# EAGLE board BITS GOA_Arduino_MEGA2560 shield (1) (EAGLE 6.5.0)
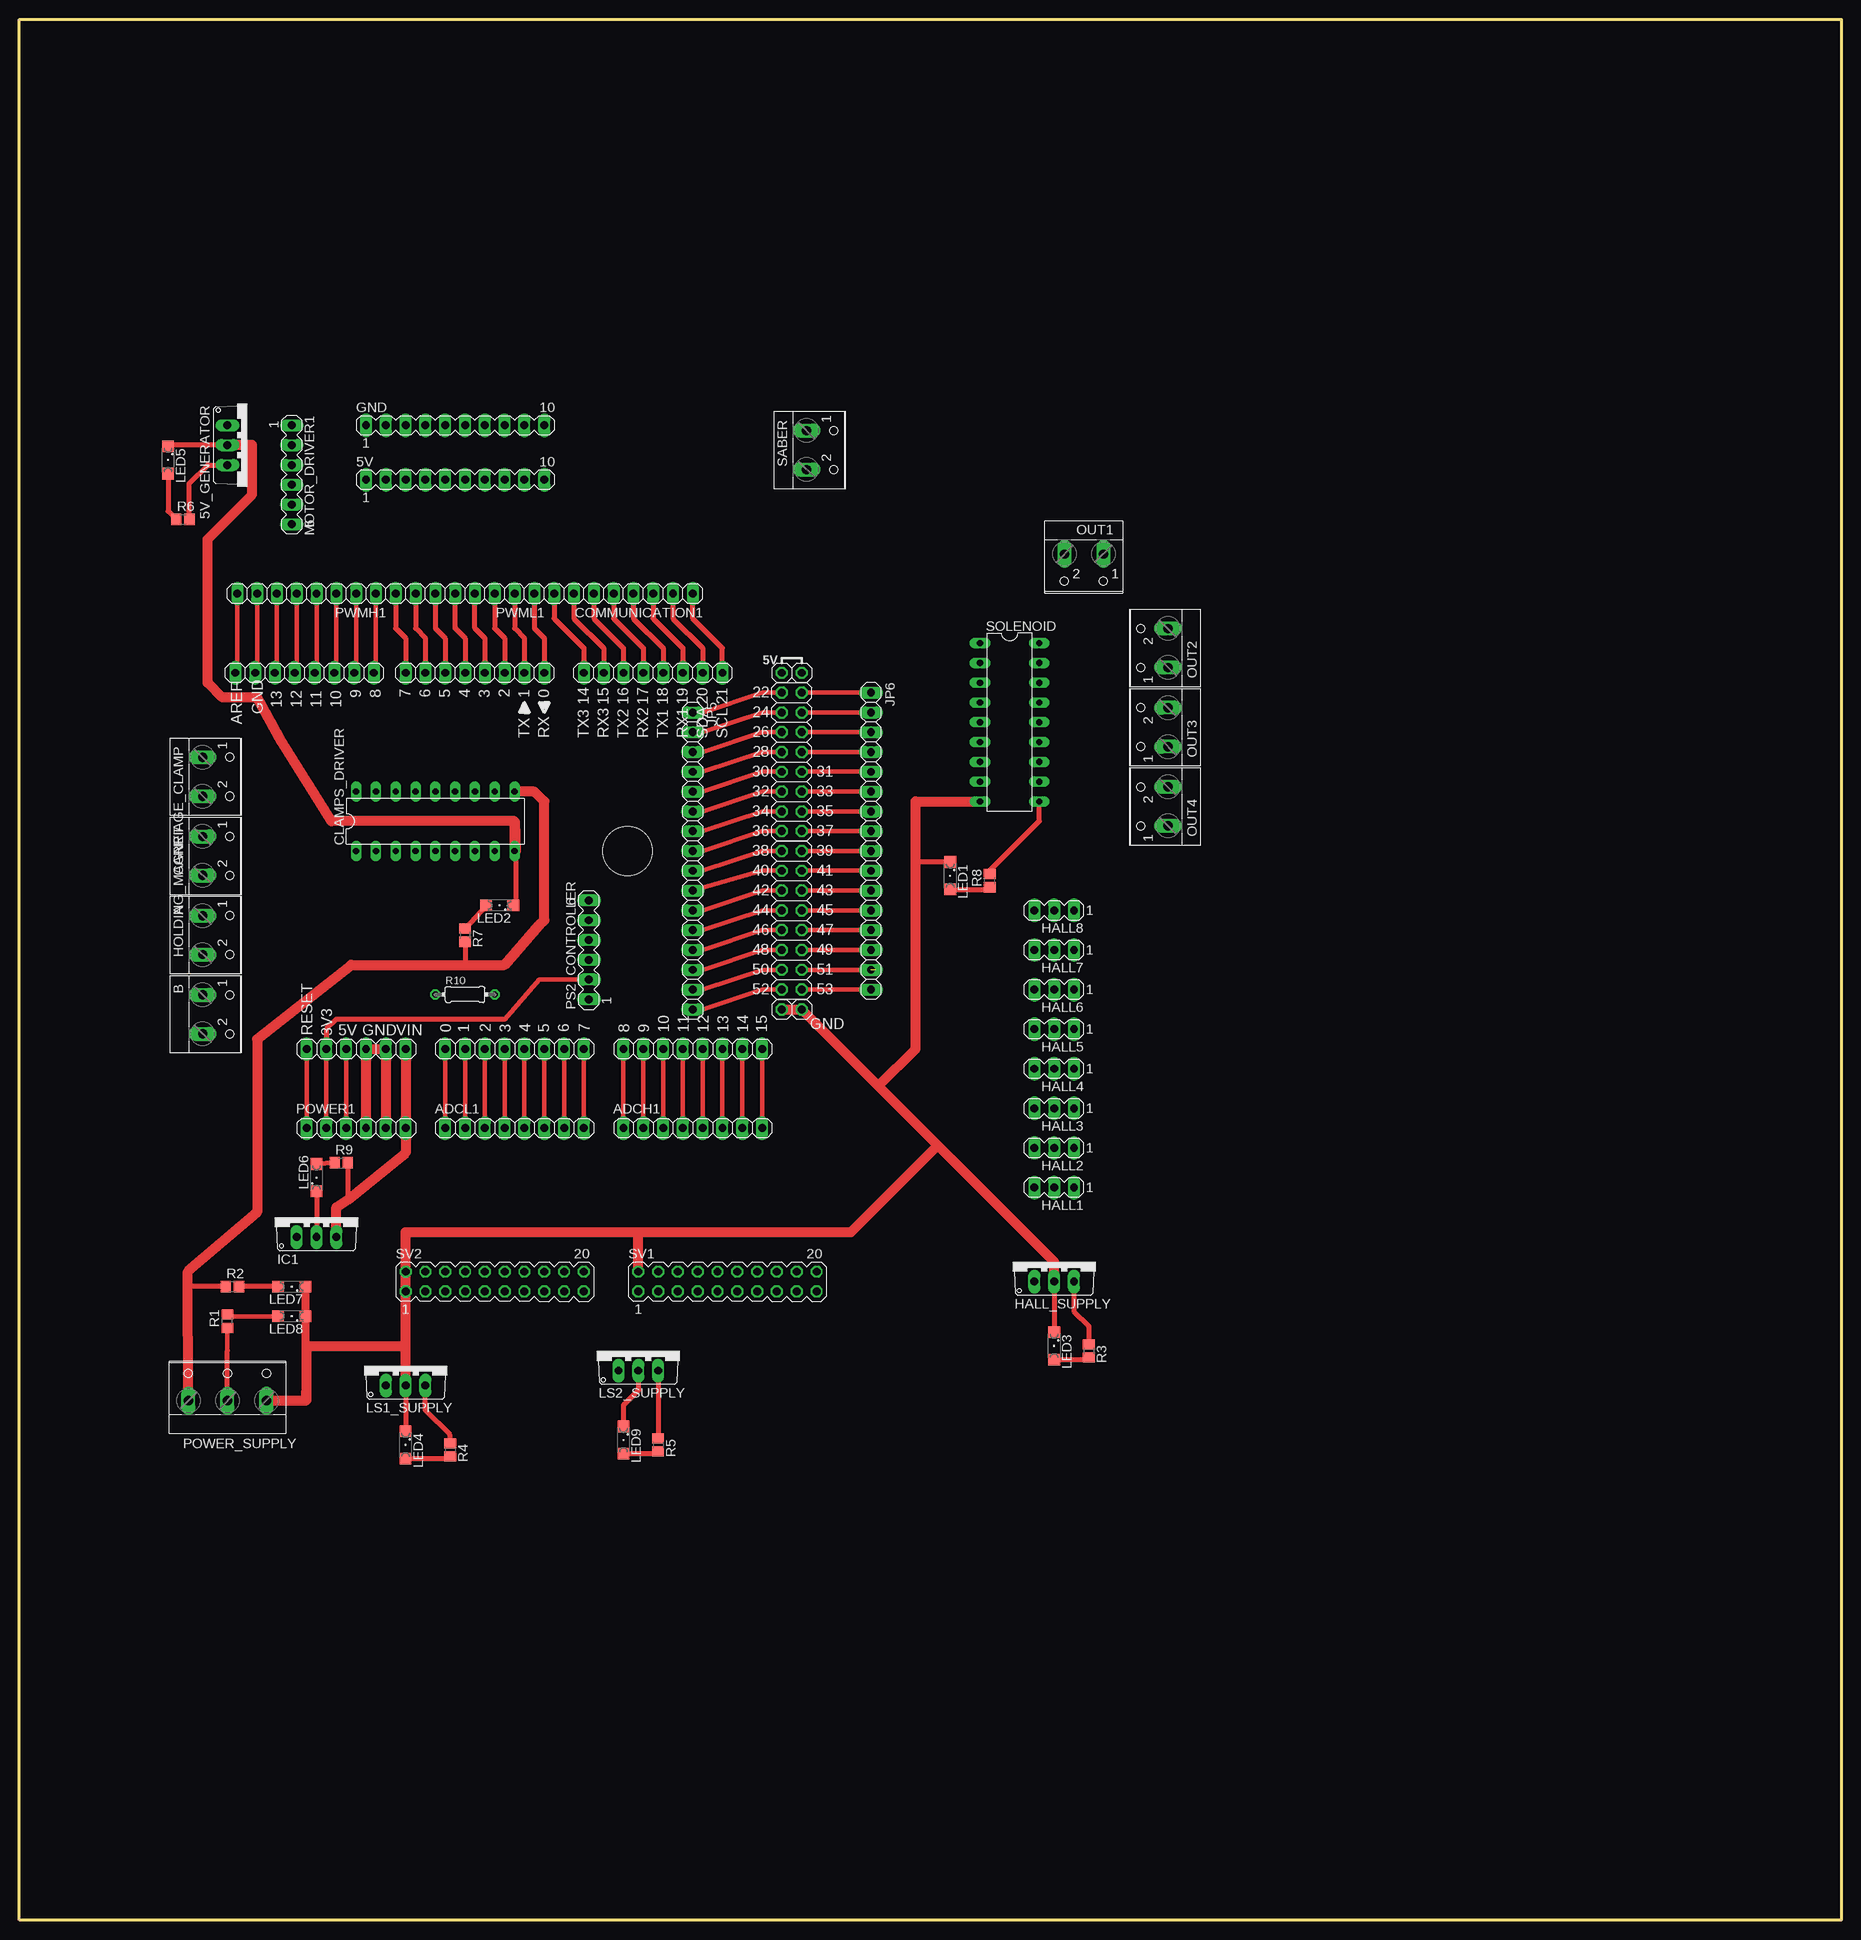
[diagram p0: board, top side]
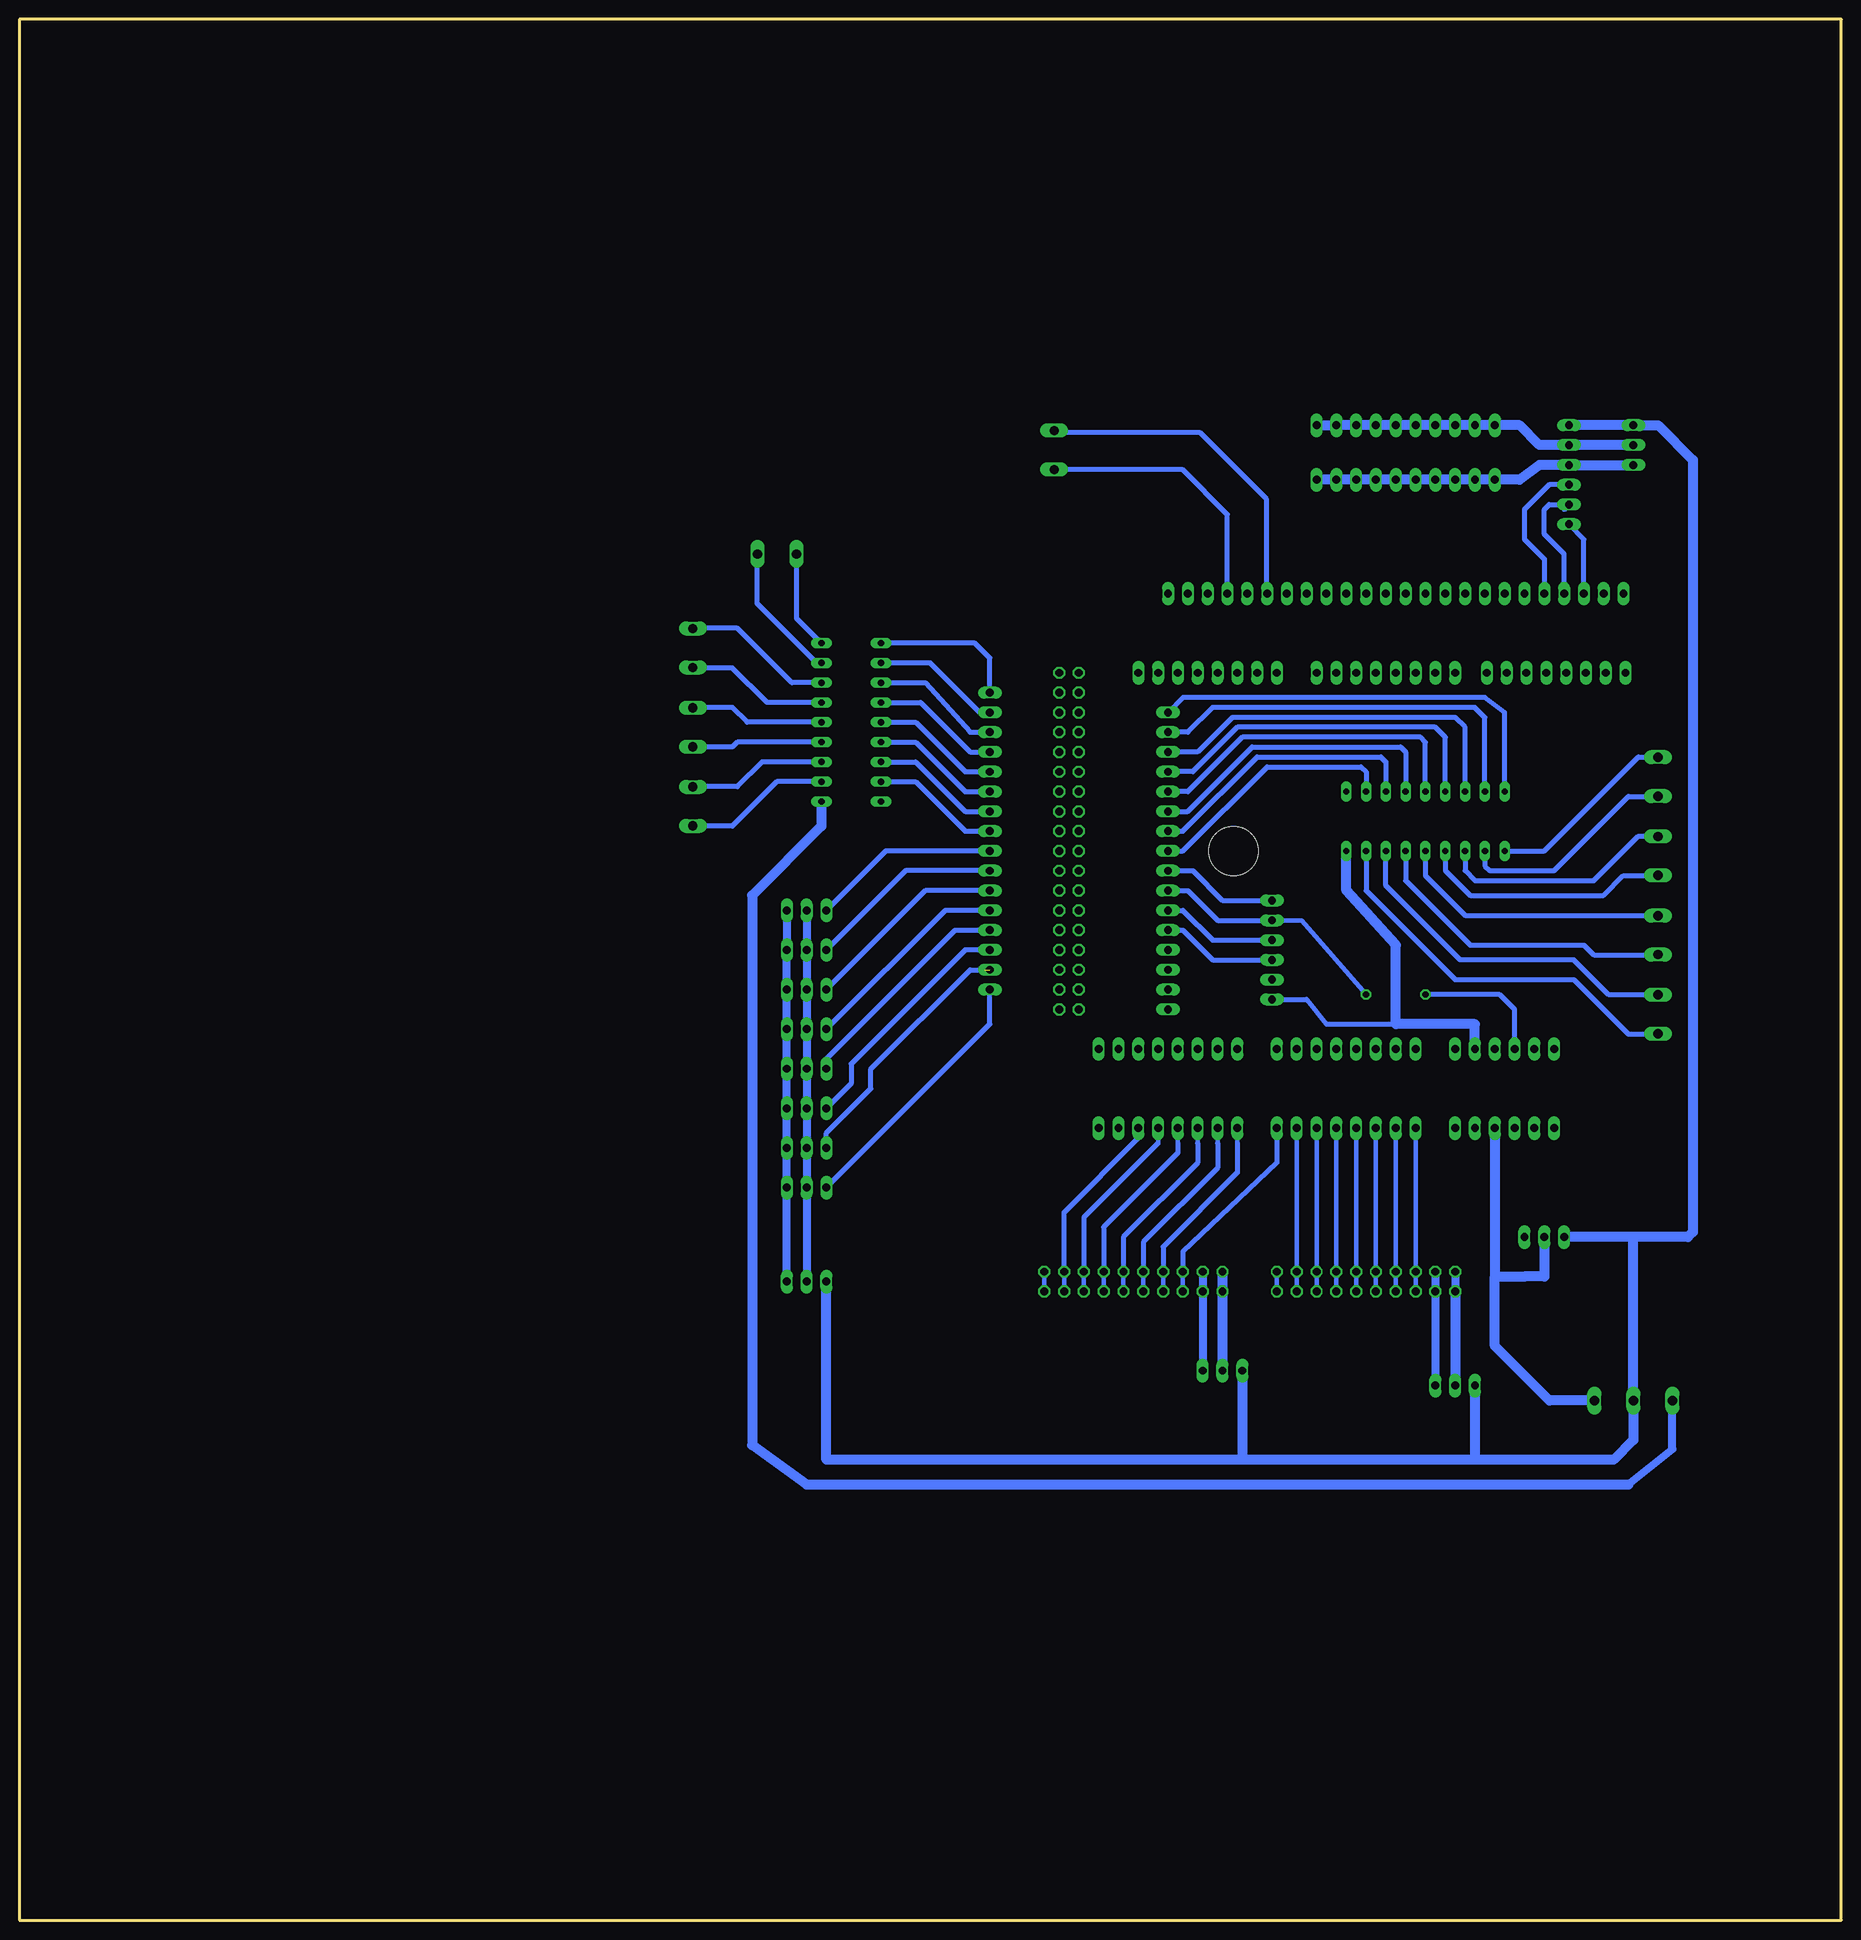
[diagram p1: board, bottom side, seen from below]

Size 233.68 x 243.84 mm. Coordinates in mm from the lower left corner, seen from the top.
Outline: 0,0 0,243.84 233.68,243.84 233.68,0 0,0
Copper layers (1*16): Top 0.035mm / dielectric 1.5mm / Bottom 0.035mm
Design rules "default": minimum track width 6mil, minimum drill 12mil, track to track 6mil, track to pad 6mil, pad to pad 6mil, via to via 6mil, smd to smd 6mil, copper to edge 40mil, drill to drill 12mil, minimum pad ring 10mil, minimum via ring 10mil, stop-mask expansion 2mil, vias tented up to drill 1mil, thermal gap 10mil
Net classes: 0 default: width 0.6 mm, drill 0.305 mm, clearance 0.305 mm; 1 GND: width 1 mm, drill 0.305 mm, clearance 0.305 mm to class 0, clearance 0.305 mm; 2 Power: width 1 mm, drill 0.305 mm, clearance 0.305 mm to class 0, clearance 0.305 mm to class 1, clearance 0.305 mm
Holes 6.35 mm at 77.98,137.16

## Footprints (pad centres in the part's own frame; a part is rotated, then mirrored left to right if it is on the bottom)
MA10-1 = drill 1.016 long: 1 -11.43,0; 2 -8.89,0; 3 -6.35,0; 4 -3.81,0; 5 -1.27,0; 6 1.27,0; 7 3.81,0; 8 6.35,0; 9 8.89,0; 10 11.43,0
TO220V = drill 1.016 long: 1 -2.54,-2.54; 2 0,-2.54; 3 2.54,-2.54
W237-102 = drill 1.194 long: 1 -2.5,-1.27; 2 2.5,-1.27
1X08 = drill 1.016 long: 1 -8.89,0; 2 -6.35,0; 3 -3.81,0; 4 -1.27,0; 5 1.27,0; 6 3.81,0; 7 6.35,0; 8 8.89,0
DIL18 = drill 0.813 long: 1 -10.16,-3.81; 2 -7.62,-3.81; 3 -5.08,-3.81; 4 -2.54,-3.81; 5 0,-3.81; 6 2.54,-3.81; 7 5.08,-3.81; 8 7.62,-3.81; 9 10.16,-3.81; 10 10.16,3.81; 11 7.62,3.81; 12 5.08,3.81; 13 2.54,3.81; 14 0,3.81; 15 -2.54,3.81; 16 -5.08,3.81; 17 -7.62,3.81; 18 -10.16,3.81
MA03-1 = drill 1.016 long: 1 -2.54,0; 2 0,0; 3 2.54,0
1X01 = drill 1.016 octagon: 1 0,0
1X16 = drill 1.016 long: 1 -19.05,0; 2 -16.51,0; 3 -13.97,0; 4 -11.43,0; 5 -8.89,0; 6 -6.35,0; 7 -3.81,0; 8 -1.27,0; 9 1.27,0; 10 3.81,0; 11 6.35,0; 12 8.89,0; 13 11.43,0; 14 13.97,0; 15 16.51,0; 16 19.05,0
SML1206 = smd 1.5 x 1.5: A 1.75,0; C -1.75,0
MA06-1 = drill 1.016 long: 1 -6.35,0; 2 -3.81,0; 3 -1.27,0; 4 1.27,0; 5 3.81,0; 6 6.35,0
1X06 = drill 1.016 long: 1 -6.35,0; 2 -3.81,0; 3 -1.27,0; 4 1.27,0; 5 3.81,0; 6 6.35,0
W237-103 = drill 1.194 long: 1 -5,-1.29; 2 0,-1.29; 3 5,-1.29
R0805 = smd 1.3 x 1.5: 1 -0.85,0; 2 0.85,0
0204/7 = drill 0.813 octagon: 1 -3.81,0; 2 3.81,0
MA10-2 = drill 1.016 octagon: 1 -11.43,-1.27; 2 -11.43,1.27; 3 -8.89,-1.27; 4 -8.89,1.27; 5 -6.35,-1.27; 6 -6.35,1.27; 7 -3.81,-1.27; 8 -3.81,1.27; 9 -1.27,-1.27; 10 -1.27,1.27; 11 1.27,-1.27; 12 1.27,1.27; 13 3.81,-1.27; 14 3.81,1.27; 15 6.35,-1.27; 16 6.35,1.27; 17 8.89,-1.27; 18 8.89,1.27; 19 11.43,-1.27; 20 11.43,1.27
2X08 = drill 1.016 octagon: 1 -8.89,-1.27; 2 -8.89,1.27; 3 -6.35,-1.27; 4 -6.35,1.27; 5 -3.81,-1.27; 6 -3.81,1.27; 7 -1.27,-1.27; 8 -1.27,1.27; 9 1.27,-1.27; 10 1.27,1.27; 11 3.81,-1.27; 12 3.81,1.27; 13 6.35,-1.27; 14 6.35,1.27; 15 8.89,-1.27; 16 8.89,1.27

## Placement (x,y rotation side)
5V  [MA10-1]  55.88,184.78 0 top
5V_GENERATOR  7805TV  [TO220V]  29.21,189.23 270 top
A  [W237-102]  24.77,126.37 270 top
ADCH  [1X08]  86.36,111.76 0 top
ADCH1  [1X08]  86.36,101.6 0 top
ADCL  [1X08]  63.5,111.76 0 top
ADCL1  [1X08]  63.5,101.6 0 top
B  [W237-102]  24.77,116.2 270 top
CARRIAGE_CLAMP  [W237-102]  24.77,146.69 270 top
CLAMPS_DRIVER  [DIL18]  53.34,140.97 0 top
COMMUNICATION  [1X08]  81.28,160.02 180 top
COMMUNICATION1  [1X08]  77.47,170.18 180 top
GND  [MA10-1]  55.88,191.77 0 top
HALL1  [MA03-1]  132.72,93.98 180 top
HALL2  [MA03-1]  132.72,99.06 180 top
HALL3  [MA03-1]  132.72,104.14 180 top
HALL4  [MA03-1]  132.72,109.22 180 top
HALL5  [MA03-1]  132.72,114.3 180 top
HALL6  [MA03-1]  132.72,119.38 180 top
HALL7  [MA03-1]  132.72,124.46 180 top
HALL8  [MA03-1]  132.72,129.54 180 top
HALL_SUPPLY  7805TV  [TO220V]  132.72,84.45 0 top
HOLDING_MAGNET  [W237-102]  24.77,136.53 270 top
IC1  7812TV  [TO220V]  38.1,90.17 0 top
JP1  [1X01]  97.79,160.02 0 top
JP2  [1X01]  100.33,160.02 0 top
JP3  [1X01]  97.79,116.84 0 top
JP4  [1X01]  100.33,116.84 0 top
JP5  [1X16]  86.36,135.89 270 top
JP6  [1X16]  109.22,138.43 270 top
LED1  [SML1206]  119.38,133.98 270 top
LED2  [SML1206]  61.59,130.18 180 top
LED3  [SML1206]  132.72,73.66 270 top
LED4  [SML1206]  49.53,60.96 270 top
LED5  [SML1206]  19.05,187.33 270 top
LED6  [SML1206]  38.1,95.25 90 top
LED7  [SML1206]  34.92,81.28 180 top
LED8  [SML1206]  34.92,77.47 180 top
LED9  [SML1206]  77.47,61.59 270 top
LS1_SUPPLY  7805TV  [TO220V]  49.53,71.12 0 top
LS2_SUPPLY  7805TV  [TO220V]  79.38,73.03 0 top
MOTOR_DRIVER1  [MA06-1]  34.92,185.42 270 top
OUT1  [W237-102]  136.52,173.99 180 top
OUT2  [W237-102]  146.05,163.19 90 top
OUT3  [W237-102]  146.05,153.03 90 top
OUT4  [W237-102]  146.05,142.88 90 top
POWER  [1X06]  43.18,111.76 0 top
POWER1  [1X06]  43.18,101.6 0 top
POWER_SUPPLY  [W237-103]  26.67,67.94 0 top
PS2_CONTROLLER  [MA06-1]  73.03,124.46 90 top
PWMH  [1X08]  36.58,160.02 180 top
PWMH1  [1X08]  36.83,170.18 180 top
PWML  [1X08]  58.42,160.02 180 top
PWML1  [1X08]  57.15,170.18 180 top
R1  [R0805]  26.67,76.83 90 top
R2  [R0805]  27.3,81.28 0 top
R3  [R0805]  137.16,73.03 270 top
R4  [R0805]  55.24,60.32 270 top
R5  [R0805]  81.92,60.96 270 top
R6  [R0805]  20.96,179.71 0 top
R7  [R0805]  57.15,126.37 270 top
R8  [R0805]  124.46,133.35 90 top
R9  [R0805]  41.27,97.16 0 top
R10  [0204/7]  57.15,118.75 0 top
SABER  [W237-102]  102.23,188.59 270 top
SOLENOID  [DIL18]  127,153.67 270 top
SV1  [MA10-2]  90.81,81.91 0 top
SV2  [MA10-2]  60.96,81.91 0 top
XIOH  [2X08]  99.06,148.59 90 top
XIOL  [2X08]  99.06,128.27 90 top

## Library data of the parts
5V GND HALL1-HALL8 MOTOR_DRIVER1 PS2_CONTROLLER SV1 SV2 = con-lstb; OC_FARNELL: unknown; OC_NEWARK: unknown
5V_GENERATOR HALL_SUPPLY IC1 LS1_SUPPLY LS2_SUPPLY = linear
A B CARRIAGE_CLAMP HOLDING_MAGNET OUT1-OUT4 SABER = con-wago-500; MPN: 237-102; OC_FARNELL: unknown; OC_NEWARK: 70K9898
ADCH ADCH1 ADCL ADCL1 COMMUNICATION COMMUNICATION1 JP1-JP6 POWER POWER1 PWMH PWMH1 PWML PWML1 XIOH XIOL = pinhead
CLAMPS_DRIVER SOLENOID = uln-udn
LED1-LED9 = led
POWER_SUPPLY = con-wago-500; MPN: 237-103; OC_FARNELL: unknown; OC_NEWARK: 18M7116
R1-R9 = resistor
R10 = eagle-ltspice; SPICEMODEL: NONE; SPICEPREFIX: R

## Nets
+5V [Power]: HALL1.1 HALL2.1 HALL3.1 HALL4.1 HALL5.1 HALL6.1 HALL7.1 HALL8.1 HALL_SUPPLY.3 R3.1
+12V [Power]: 5V_GENERATOR.1 HALL_SUPPLY.1 IC1.1 LS1_SUPPLY.1 LS2_SUPPLY.1 MOTOR_DRIVER1.1 POWER_SUPPLY.2 R1.1
+24V [Power]: CLAMPS_DRIVER.10 POWER_SUPPLY.1 R2.1 R7.2 R8.2 SOLENOID.10
GND [GND]: 5V_GENERATOR.2 CLAMPS_DRIVER.9 GND.1 GND.2 GND.3 GND.4 GND.5 GND.6 GND.7 GND.8 GND.9 GND.10 HALL1.2 HALL2.2 HALL3.2 HALL4.2 HALL5.2 HALL6.2 HALL7.2 HALL8.2 HALL_SUPPLY.2 IC1.2 JP3.1 JP4.1 LED1.C LED2.C LED3.C LED4.C LED5.C LED6.C LED7.C LED8.C LED9.C LS1_SUPPLY.2 LS2_SUPPLY.2 MOTOR_DRIVER1.2 POWER1.4 POWER1.5 POWER.4 POWER.5 POWER_SUPPLY.3 PS2_CONTROLLER.1 SOLENOID.9 SV1.1 SV1.2 SV2.1 SV2.2
N$1: PWMH1.1 PWMH.1
N$2: PWMH1.2 PWMH.2
N$3: PWMH1.3 PWMH.3
N$4: MOTOR_DRIVER1.4 PWMH1.4 PWMH.4
N$5: MOTOR_DRIVER1.5 PWMH1.5 PWMH.5
N$6: MOTOR_DRIVER1.6 PWMH1.6 PWMH.6
N$7: PWMH1.7 PWMH.7
N$8: PWMH1.8 PWMH.8
N$9: ADCH1.8 ADCH.8
N$11: ADCH1.6 ADCH.6 SV1.17 SV1.18
N$12: ADCH1.5 ADCH.5 SV1.15 SV1.16
N$13: ADCH1.4 ADCH.4 SV1.13 SV1.14
N$14: ADCH1.3 ADCH.3 SV1.11 SV1.12
N$15: ADCH1.2 ADCH.2 SV1.9 SV1.10
N$16: ADCH1.1 ADCH.1 SV1.7 SV1.8
N$17: POWER1.1 POWER.1
N$18: POWER1.2 POWER.2 PS2_CONTROLLER.2
N$19: POWER1.3 POWER.3 R10.1
N$20 [Power]: IC1.3 POWER1.6 POWER.6 R9.2
N$21: LED7.A R2.2
N$22: OUT1.2 SOLENOID.18
N$23: COMMUNICATION1.8 COMMUNICATION.8
N$24: COMMUNICATION1.7 COMMUNICATION.7
N$25: COMMUNICATION1.6 COMMUNICATION.6 SABER.1
N$26: COMMUNICATION1.5 COMMUNICATION.5
N$27: COMMUNICATION1.4 COMMUNICATION.4 SABER.2
N$28: COMMUNICATION1.3 COMMUNICATION.3
N$29: COMMUNICATION1.2 COMMUNICATION.2
N$30: COMMUNICATION1.1 COMMUNICATION.1
N$31: PWML1.8 PWML.8
N$32: PWML1.7 PWML.7
N$33: PWML1.6 PWML.6
N$34: PWML1.5 PWML.5
N$35: PWML1.4 PWML.4
N$36: PWML1.3 PWML.3
N$37: PWML1.2 PWML.2
N$38: PWML1.1 PWML.1
N$39: ADCL1.8 ADCL.8 SV1.5 SV1.6
N$40: ADCL1.7 ADCL.7 SV2.17 SV2.18
N$42: ADCL1.5 ADCL.5 SV2.13 SV2.14
N$44: ADCL1.3 ADCL.3 SV2.9 SV2.10
N$45: ADCL1.2 ADCL.2 SV2.7 SV2.8
N$46: ADCL1.1 ADCL.1 SV2.5 SV2.6
N$47: CLAMPS_DRIVER.18 JP5.1 XIOH.16
N$48: CLAMPS_DRIVER.17 JP5.2 XIOH.14
N$49: CLAMPS_DRIVER.16 JP5.3 XIOH.12
N$50: CLAMPS_DRIVER.15 JP5.4 XIOH.10
N$51: CLAMPS_DRIVER.14 JP5.5 XIOH.8
N$52: CLAMPS_DRIVER.13 JP5.6 XIOH.6
N$53: CLAMPS_DRIVER.12 JP5.7 XIOH.4
N$54: JP5.12 PS2_CONTROLLER.3 XIOL.10
N$55: JP5.9 PS2_CONTROLLER.6 XIOL.16
N$56: JP5.10 PS2_CONTROLLER.5 R10.2 XIOL.14
N$57: JP5.11 PS2_CONTROLLER.4 XIOL.12
N$58: JP5.13 XIOL.8
N$59: JP5.14 XIOL.6
N$60: JP5.15 XIOL.4
N$61: JP6.1 SOLENOID.1 XIOH.15
N$62: JP6.2 SOLENOID.2 XIOH.13
N$63: JP6.3 SOLENOID.3 XIOH.11
N$64: JP6.4 SOLENOID.4 XIOH.9
N$65: JP6.5 SOLENOID.5 XIOH.7
N$66: JP6.6 SOLENOID.6 XIOH.5
N$67: JP6.7 SOLENOID.7 XIOH.3
N$68: JP6.8 SOLENOID.8 XIOH.1
N$69: HALL8.3 JP6.9 XIOL.15
N$70: HALL7.3 JP6.10 XIOL.13
N$71: HALL6.3 JP6.11 XIOL.11
N$72: HALL5.3 JP6.12 XIOL.9
N$73: HALL4.3 JP6.13 XIOL.7
N$74: HALL3.3 JP6.14 XIOL.5
N$75: JP5.16 XIOL.2
N$76: HALL1.3 JP6.16 XIOL.1
N$77: HALL2.3 JP6.15 XIOL.3
N$78: CLAMPS_DRIVER.11 JP5.8 XIOH.2
N$79: CARRIAGE_CLAMP.1 CLAMPS_DRIVER.1
N$80: OUT1.1 SOLENOID.17
N$81: OUT2.2 SOLENOID.16
N$82: OUT2.1 SOLENOID.15
N$83: OUT3.2 SOLENOID.14
N$84: OUT3.1 SOLENOID.13
N$85: OUT4.2 SOLENOID.12
N$86: OUT4.1 SOLENOID.11
N$87: CARRIAGE_CLAMP.2 CLAMPS_DRIVER.2
N$88: CLAMPS_DRIVER.3 HOLDING_MAGNET.1
N$89: CLAMPS_DRIVER.4 HOLDING_MAGNET.2
N$90: A.1 CLAMPS_DRIVER.5
N$91: A.2 CLAMPS_DRIVER.6
N$92: B.1 CLAMPS_DRIVER.7
N$93: B.2 CLAMPS_DRIVER.8
N$96: LED8.A R1.2
N$97: LED3.A R3.2
N$98: LED4.A R4.2
N$99: LED9.A R5.2
N$100: 5V.1 5V.2 5V.3 5V.4 5V.5 5V.6 5V.7 5V.8 5V.9 5V.10 5V_GENERATOR.3 MOTOR_DRIVER1.3 R6.2
N$101: LED5.A R6.1
N$102: LED6.A R9.1
N$103: LED1.A R8.1
N$104: LED2.A R7.1
N$105: ADCH1.7 ADCH.7
N$110: SV2.19 SV2.20
N$111: SV1.19 SV1.20
N$114: ADCL1.6 ADCL.6 SV2.15 SV2.16
N$116: ADCL1.4 ADCL.4 SV2.11 SV2.12
V+ [Power]: LS2_SUPPLY.3 R5.1 SV1.3 SV1.4
VCC [Power]: LS1_SUPPLY.3 R4.1 SV2.3 SV2.4

## Tracks (layer width: path | path; a pad name or v marks a point on that pad's centre or on a via)
+5V
  Top 0.61: HALL_SUPPLY.3 135.25,78.1 137.16,76.2 R3.1
  Bottom 1: HALL_SUPPLY.3 HALL1.1 HALL2.1 HALL3.1 HALL4.1 HALL5.1 HALL6.1 HALL7.1 HALL8.1
+12V
  Top 0.6: 26.67,73.03 R1.1
  Top 0.61: POWER_SUPPLY.2 26.67,73.03
  Bottom 1.27: 26.67,87.63 POWER_SUPPLY.2 26.67,61.59 29.21,59.05 46.99,59.05 | 26.67,87.63 IC1.1 | 76.84,59.05 130.17,59.05 HALL_SUPPLY.1 | LS2_SUPPLY.1 76.84,59.05 | LS1_SUPPLY.1 46.99,59.05 | MOTOR_DRIVER1.1 5V_GENERATOR.1 23.5,191.77 19.05,187.33 19.05,88.27 19.68,87.63 26.67,87.63 | 46.99,59.05 76.84,59.05
+24V
  Top 0.61: R7.2 57.15,122.56 | R2.1 21.6,81.28 21.59,83.18 | R8.2 124.46,134.62 130.81,140.97 SOLENOID.10
  Top 1.27: POWER_SUPPLY.1 21.59,83.18 21.59,83.19 30.48,90.81 30.48,113.03 42.54,122.56 57.15,122.56 62.23,122.56 66.67,127.63 67.31,128.27 67.31,143.51 66.04,144.78 CLAMPS_DRIVER.10
  Bottom 1: 27.3,55.88 21.67,60.41 POWER_SUPPLY.1
  Bottom 1.27: 27.3,55.88 132.72,55.88 139.7,60.96 139.7,131.44 130.81,140.34 SOLENOID.10
GND
  Top 0.61: LED6.C IC1.2 | LS1_SUPPLY.2 LED4.C | 5V_GENERATOR.2 19.21,189.23 LED5.C | 63.65,137.16 63.65,130.48 LED2.C | LED1.C 115.09,135.73 114.94,135.89 | LS2_SUPPLY.2 79.38,67.94 77.47,66.04 LED9.C | HALL_SUPPLY.2 LED3.C
  Top 1: 36.83,73.66 36.67,66.83 LED8.C LED7.C
  Top 1.27: POWER1.5 POWER.5 POWER.4 POWER1.4 | JP3.1 JP4.1 110.17,107 | SOLENOID.9 114.94,143.51 114.94,135.89 114.94,111.76 110.17,107 | HALL_SUPPLY.2 132.72,84.45 117.79,99.38 | 117.79,99.38 110.17,107 | SV1.2 79.38,88.27 | LS1_SUPPLY.2 49.53,73.66 | 49.53,73.66 49.53,88.27 79.38,88.27 | CLAMPS_DRIVER.9 63.5,140.97 | 63.5,140.97 40,140.97 33.65,151.13 30.48,156.84 26.04,156.84 24.13,158.75 24.13,177.16 29.84,182.88 29.84,189.23 5V_GENERATOR.2 | 49.53,73.66 36.83,73.66 36.83,66.67 POWER_SUPPLY.3 | 63.5,140.97 63.65,137.16 | 79.38,88.27 106.68,88.27 117.79,99.38
  Bottom 0.61: PS2_CONTROLLER.1 68.58,118.11 66.04,114.94 57.15,114.94
  Bottom 1: HALL8.2 HALL7.2 HALL6.2 HALL5.2 HALL4.2 HALL3.2 HALL2.2 HALL1.2 HALL_SUPPLY.2 | SV2.2 SV2.1 | 40.64,82.55 40.56,82.47
  Bottom 1.27: SV1.2 SV1.1 LS2_SUPPLY.2 | SV2.1 LS1_SUPPLY.2 | CLAMPS_DRIVER.9 63.5,132.08 57.15,125.09 57.15,114.94 46.99,114.94 POWER.5 | 5V_GENERATOR.2 MOTOR_DRIVER1.2 38.73,189.23 41.27,191.77 GND.1 GND.2 GND.3 GND.4 GND.5 GND.6 GND.7 GND.8 GND.9 GND.10 | POWER1.4 44.45,82.55 | 44.45,82.55 40.64,82.55 38.1,82.55 IC1.2 | POWER_SUPPLY.3 37.45,66.66 44.45,73.66 44.45,82.55
N$1
  Top 0.6: PWMH1.1 45.72,160.27 PWMH.1
N$2
  Top 0.6: PWMH1.2 43.18,160.27 PWMH.2
N$3
  Top 0.6: PWMH1.3 40.64,160.27 PWMH.3
N$4
  Top 0.6: PWMH1.4 38.1,160.27 PWMH.4
  Bottom 0.61: MOTOR_DRIVER1.4 37.46,184.15 40.64,180.97 40.64,177.16 38.1,174.62 PWMH1.4
N$5
  Top 0.6: PWMH1.5 35.56,160.27 PWMH.5
  Bottom 0.61: 35.56,180.97 MOTOR_DRIVER1.5 37.46,181.61 38.1,180.97 38.1,177.8 35.56,175.26 PWMH1.5
N$6
  Top 0.6: PWMH1.6 33.02,160.27 PWMH.6
  Bottom 0.61: PWMH1.6 33.02,177.16 MOTOR_DRIVER1.6
N$7
  Top 0.6: PWMH1.7 30.48,160.27 PWMH.7
N$8
  Top 0.6: PWMH1.8 27.94,160.27 PWMH.8
N$9
  Top 0.6: ADCH.8 ADCH1.8
N$11
  Top 0.6: ADCH.6 ADCH1.6
  Bottom 0.6: SV1.18 SV1.17
  Bottom 0.61: SV1.18 99.7,90.81 90.17,100.33 ADCH1.6
N$12
  Top 0.6: ADCH.5 ADCH1.5
  Bottom 0.6: SV1.16 SV1.15 | ADCH1.5 87.63,99.69
  Bottom 0.61: 87.63,99.69 97.16,90.17 SV1.16
N$13
  Top 0.6: ADCH.4 ADCH1.4
  Bottom 0.6: SV1.14 SV1.13 | ADCH1.4 85.09,99.69
  Bottom 0.61: 85.09,99.69 85.09,98.42 94.62,88.9 SV1.14
N$14
  Top 0.6: ADCH.3 ADCH1.3
  Bottom 0.6: SV1.12 SV1.11 | ADCH1.3 82.55,99.69
  Bottom 0.61: 82.55,99.69 82.55,97.16 92.08,87.63 SV1.12
N$15
  Top 0.6: ADCH.2 ADCH1.2
  Bottom 0.6: SV1.10 SV1.9 | ADCH1.2 80.01,99.69
  Bottom 0.61: 80.01,99.69 80.01,96.52 89.54,87 SV1.10
N$16
  Top 0.6: ADCH.1 ADCH1.1
  Bottom 0.6: SV1.8 SV1.7 | ADCH1.1 77.47,99.69
  Bottom 0.61: 77.47,99.69 77.47,95.88 87,86.36 SV1.8
N$17
  Top 0.6: POWER1.1 POWER.1
N$18
  Top 0.6: POWER.2 POWER1.2 | 62.23,115.57 66.67,120.65 PS2_CONTROLLER.2
  Top 0.61: 62.23,115.57 40.64,115.57 39.37,114.3 POWER.2
N$19
  Top 0.6: POWER.3 POWER1.3
  Bottom 0.61: POWER.3 41.91,116.84 43.81,118.75 R10.1
N$20
  Top 0.61: R9.2 42.12,92.39
  Top 1.27: POWER.6 POWER1.6 49.53,98.42 42.12,92.39 40.64,91.44 IC1.3
N$21
  Top 0.61: LED7.A R2.2
N$22
  Bottom 0.61: SOLENOID.18 133.98,167 133.98,175.22 OUT1.2
N$23
  Top 0.61: COMMUNICATION1.8 68.58,167 72.39,163.19 COMMUNICATION.8
N$24
  Top 0.61: COMMUNICATION1.7 71.12,167 74.93,163.19 COMMUNICATION.7
N$25
  Top 0.61: COMMUNICATION1.6 73.66,167 77.47,163.19 COMMUNICATION.6
  Bottom 0.6: COMMUNICATION1.6 73.7,170.81
  Bottom 0.61: 73.7,170.81 73.7,182.28 82.23,190.82 100.69,190.82 SABER.1
N$26
  Top 0.61: COMMUNICATION1.5 76.2,167 80.01,163.19 COMMUNICATION.5
N$27
  Top 0.61: COMMUNICATION1.4 78.74,167 82.55,163.19 COMMUNICATION.4
  Bottom 0.61: COMMUNICATION1.4 78.74,180.34 84.45,186.06 100.92,186.06 SABER.2
N$28
  Top 0.61: COMMUNICATION1.3 81.28,167 85.09,163.19 COMMUNICATION.3
N$29
  Top 0.61: COMMUNICATION1.2 83.82,167 87.63,163.19 COMMUNICATION.2
N$30
  Top 0.61: COMMUNICATION.1 90.17,163.19 86.36,167 COMMUNICATION1.1
N$31
  Top 0.61: PWML1.8 48.26,165.73 49.53,164.47 PWML.8
N$32
  Top 0.61: PWML1.7 50.8,165.73 52.07,164.47 PWML.7
N$33
  Top 0.61: PWML1.6 53.34,165.73 54.61,164.47 PWML.6
N$34
  Top 0.61: PWML1.5 55.88,165.73 57.15,164.47 PWML.5
N$35
  Top 0.61: PWML1.4 58.42,165.73 59.69,164.47 PWML.4
N$36
  Top 0.61: PWML1.3 60.96,165.73 62.23,164.47 PWML.3
N$37
  Top 0.61: PWML1.2 63.5,165.73 64.77,164.47 PWML.2
N$38
  Top 0.61: PWML1.1 66.04,165.73 67.31,164.47 PWML.1
N$39
  Top 0.6: ADCL.8 ADCL1.8
  Bottom 0.6: SV1.6 SV1.5 | ADCL1.8 72.39,100.97
  Bottom 0.61: 72.39,100.97 72.39,97.16 84.45,85.72 SV1.6
N$40
  Top 0.6: ADCL.7 ADCL1.7
  Bottom 0.6: ADCL1.7 SV2.18 SV2.17
N$42
  Top 0.6: ADCL.5 ADCL1.5
  Bottom 0.6: ADCL1.5 SV2.14 SV2.13
N$44
  Top 0.6: ADCL.3 ADCL1.3
  Bottom 0.6: ADCL1.3 SV2.10 SV2.9
N$45
  Top 0.6: ADCL.2 ADCL1.2
  Bottom 0.6: ADCL1.2 SV2.8 SV2.7
N$46
  Top 0.6: ADCL.1 ADCL1.1
  Bottom 0.6: ADCL1.1 SV2.6 SV2.5
N$47
  Top 0.6: XIOH.16 95.25,157.48 87.63,154.94 JP5.1
  Bottom 0.61: JP5.1 84.45,156.84 45.72,156.84 43.18,154.94 CLAMPS_DRIVER.18
N$48
  Top 0.6: XIOH.14 95.25,154.94 87.63,152.4 JP5.2
  Bottom 0.61: CLAMPS_DRIVER.17 45.72,154.31 46.99,155.57 80.65,155.57 83.82,152.4 JP5.2
N$49
  Top 0.6: JP5.3 87.63,149.86 95.25,152.4 XIOH.12
  Bottom 0.61: CLAMPS_DRIVER.16 48.26,153.03 49.53,154.31 78.11,154.31 82.55,149.86 JP5.3
N$50
  Top 0.6: XIOH.10 95.25,149.86 87.63,147.32 JP5.4
  Bottom 0.61: CLAMPS_DRIVER.15 50.8,151.76 52.07,153.03 77.47,153.03 83.19,147.32 JP5.4
N$51
  Top 0.6: JP5.5 87.63,144.78 95.25,147.32 XIOH.8
  Bottom 0.61: CLAMPS_DRIVER.14 53.34,151.13 53.97,151.76 76.84,151.76 83.82,144.78 JP5.5
N$52
  Top 0.6: XIOH.6 95.25,144.78 87.63,142.24 JP5.6
  Bottom 0.61: JP5.6 83.82,142.24 75.56,150.5 56.51,150.5 55.88,149.86 CLAMPS_DRIVER.13
N$53
  Top 0.6: XIOH.4 95.25,142.24 87.63,139.7 JP5.7
  Bottom 0.61: JP5.7 84.45,139.7 74.93,149.22 59.05,149.22 58.42,148.59 CLAMPS_DRIVER.12
N$54
  Top 0.6: JP5.12 87.63,127 95.25,129.54 XIOL.10
  Bottom 0.61: JP5.12 84.45,127 80.65,123.19 PS2_CONTROLLER.3
N$55
  Top 0.6: JP5.9 87.63,134.62 95.25,137.16 XIOL.16
  Bottom 0.61: JP5.9 83.19,134.62 79.38,130.81 PS2_CONTROLLER.6
N$56
  Top 0.6: JP5.10 95.25,134.62 XIOL.14
  Bottom 0.6: PS2_CONTROLLER.5 69.22,128.27 R10.2
  Bottom 0.61: JP5.10 83.82,132.08 80.01,128.27 PS2_CONTROLLER.5
N$57
  Top 0.6: XIOL.12 95.25,132.08 87.63,129.54 JP5.11
  Bottom 0.61: JP5.11 84.45,129.54 80.65,125.73 PS2_CONTROLLER.4
N$58
  Top 0.6: XIOL.8 95.25,127 87.63,124.46 JP5.13
N$59
  Top 0.6: JP5.14 87.63,121.92 95.25,124.46 XIOL.6
N$60
  Top 0.6: XIOL.4 95.25,121.92 87.63,119.38 JP5.15
N$61
  Top 0.6: XIOH.15 JP6.1
  Bottom 0.61: SOLENOID.1 111.12,163.83 109.22,161.93 JP6.1
N$62
  Top 0.6: XIOH.13 JP6.2
  Bottom 0.61: JP6.2 110.49,154.94 116.84,161.29 SOLENOID.2
N$63
  Top 0.6: XIOH.11 JP6.3
  Bottom 0.61: SOLENOID.3 117.48,158.75 111.76,152.4 JP6.3
N$64
  Top 0.6: XIOH.9 JP6.4
  Bottom 0.61: SOLENOID.4 118.11,156.21 111.76,149.86 JP6.4
N$65
  Top 0.6: XIOH.7 JP6.5
  Bottom 0.61: SOLENOID.5 118.75,153.67 112.4,147.32 JP6.5
N$66
  Top 0.6: XIOH.5 JP6.6
  Bottom 0.61: SOLENOID.6 118.75,151.13 112.4,144.78 JP6.6
N$67
  Top 0.6: XIOH.3 JP6.7
  Bottom 0.61: SOLENOID.7 118.75,148.59 112.4,142.24 JP6.7
N$68
  Top 0.6: XIOH.1 JP6.8
  Bottom 0.61: SOLENOID.8 118.75,146.05 112.4,139.7 JP6.8
N$69
  Top 0.6: XIOL.15 JP6.9
  Bottom 0.61: JP6.9 122.56,137.16 HALL8.3
N$70
  Top 0.6: XIOL.13 JP6.10
  Bottom 0.61: JP6.10 120.02,134.62 HALL7.3
N$71
  Top 0.6: XIOL.11 JP6.11
  Bottom 0.61: JP6.11 117.48,132.08 HALL6.3
N$72
  Top 0.6: XIOL.9 JP6.12
  Bottom 0.61: JP6.12 114.94,129.54 HALL5.3
N$73
  Top 0.6: XIOL.7 JP6.13
  Bottom 0.61: HALL4.3 130.17,110.49 113.67,127 JP6.13
N$74
  Top 0.6: XIOL.5 JP6.14
  Bottom 0.61: JP6.14 112.4,124.46 127,109.85 127,107.31 HALL3.3
N$75
  Top 0.6: JP5.16 87.63,116.84 95.25,119.38 XIOL.2
N$76
  Top 0.6: XIOL.1 JP6.16
  Bottom 0.61: HALL1.3 109.22,114.94 JP6.16
N$77  (1 unrouted)
  Top 0.6: XIOL.3 JP6.15
  Bottom 0.61: 108.59,121.92 JP6.15 | HALL2.3 130.17,100.97 124.46,106.68 124.46,109.22 111.76,121.92 109.86,121.92
N$78
  Top 0.6: XIOH.2 95.25,139.7 87.63,137.16 JP5.8
  Bottom 0.61: JP5.8 84.45,137.16 73.66,147.96 61.59,147.96 60.96,147.32 CLAMPS_DRIVER.11
N$79
  Bottom 0.61: CLAMPS_DRIVER.1 38.1,137.16 26.04,149.22 23.54,149.22 CARRIAGE_CLAMP.1
N$80
  Bottom 0.61: SOLENOID.17 131.44,161.29 139.06,168.91 139.06,175.22 OUT1.1
N$81
  Bottom 0.61: SOLENOID.16 134.62,158.75 141.6,165.73 147.28,165.73 OUT2.2
N$82
  Bottom 0.61: SOLENOID.15 137.79,156.21 142.24,160.66 147.28,160.66 OUT2.1
N$83
  Bottom 0.61: SOLENOID.14 140.33,153.67 142.24,155.57 147.28,155.57 OUT3.2
N$84
  Bottom 0.61: SOLENOID.13 141.6,151.13 142.24,150.5 147.28,150.5 OUT3.1
N$85
  Bottom 0.61: SOLENOID.12 138.43,148.59 141.6,145.41 147.28,145.41 OUT4.2
N$86
  Bottom 0.61: SOLENOID.11 136.52,146.05 142.24,140.34 147.28,140.34 OUT4.1
N$87
  Bottom 0.61: CLAMPS_DRIVER.2 45.72,135.25 45.08,134.62 36.83,134.62 27.3,144.15 23.54,144.15 CARRIAGE_CLAMP.2
N$88
  Bottom 0.61: CLAMPS_DRIVER.3 48.26,134.62 46.99,133.35 31.75,133.35 26.04,139.06 23.54,139.06 HOLDING_MAGNET.1
N$89
  Bottom 0.61: CLAMPS_DRIVER.4 50.8,134.62 47.62,131.44 30.48,131.44 27.94,133.98 23.54,133.98 HOLDING_MAGNET.2
N$90
  Bottom 0.61: CLAMPS_DRIVER.5 53.34,133.98 48.26,128.91 23.54,128.91 A.1
N$91
  Bottom 0.61: CLAMPS_DRIVER.6 55.88,133.35 47.62,125.09 33.02,125.09 31.75,123.82 23.54,123.82 A.2
N$92
  Bottom 0.61: B.1 29.8,118.7 34.29,123.19 48.89,123.19 58.42,132.72 CLAMPS_DRIVER.7
N$93
  Bottom 0.61: CLAMPS_DRIVER.8 60.96,132.08 49.53,120.65 34.29,120.65 27.3,113.66 23.54,113.66 B.2
N$96
  Top 0.6: R1.2 26.67,77.47 LED8.A
N$97
  Top 0.61: LED3.A 136.89,71.91 R3.2
N$98
  Top 0.61: LED4.A 54.98,59.21 R4.2
N$99
  Top 0.61: LED9.A 81.65,59.84 R5.2
N$100
  Top 0.61: 5V_GENERATOR.3 24.13,186.69 21.8,184.37 R6.2
  Bottom 1.27: 5V_GENERATOR.3 MOTOR_DRIVER1.3 38.73,186.69 41.27,184.78 5V.1 5V.2 5V.3 5V.4 5V.5 5V.6 5V.7 5V.8 5V.9 5V.10
N$101
  Top 0.61: LED5.A 19.05,180.76 R6.1
N$102
  Top 0.61: R9.1 LED6.A
N$103
  Top 0.61: LED1.A 124.2,132.23 R8.1
N$104
  Top 0.61: LED2.A R7.1
N$105
  Top 0.6: ADCH.7 ADCH1.7
N$110
  Bottom 0.6: SV2.20 SV2.19
N$111
  Bottom 0.6: SV1.20 SV1.19
N$114
  Top 0.6: ADCL.6 ADCL1.6
  Bottom 0.6: ADCL1.6 SV2.16 SV2.15
N$116
  Top 0.6: ADCL.4 ADCL1.4
  Bottom 0.6: ADCL1.4 SV2.12 SV2.11
V+
  Top 0.61: LS2_SUPPLY.3 R5.1
  Bottom 1: SV1.4 SV1.3 LS2_SUPPLY.3
VCC
  Top 0.61: R4.1 55.24,62.23 52.07,65.41 LS1_SUPPLY.3
  Bottom 1: SV2.4 SV2.3 LS1_SUPPLY.3

## Text on the board
tPlace: 9 | 8 | 7 | 6 | 5 | 4 | 3 | 2 | 1 | 0 | 22 | 14 | 15 | 16 | 17 | 18 | 19 | 20 | 21 | 13 | 12 | 11 | 10 | 24 | 26 | 28 | 30 | 31 | 32 | 33 | 34 | 35 | 36 | 37 | 38 | 39 | 40 | 41 | 42 | 43 | 44 | 45 | 46 | 47 | 48 | 49 | 50 | 51 | 52 | 53 | 0 | 1 | 2 | 3 | 4 | 5 | 6 | 7 | 8 | 9 | 10 | 11 | 12 | 13 | 14 | 15
tNames: 5V | GND | AREF | TX | RX | TX3 | RX3 | TX2 | RX2 | TX1 | RX1 | SDA | SCL | GND | RESET | 3V3 | 5V | GND | VIN